# EAGLE board shield_arduino_mega (EAGLE 7.7.0)
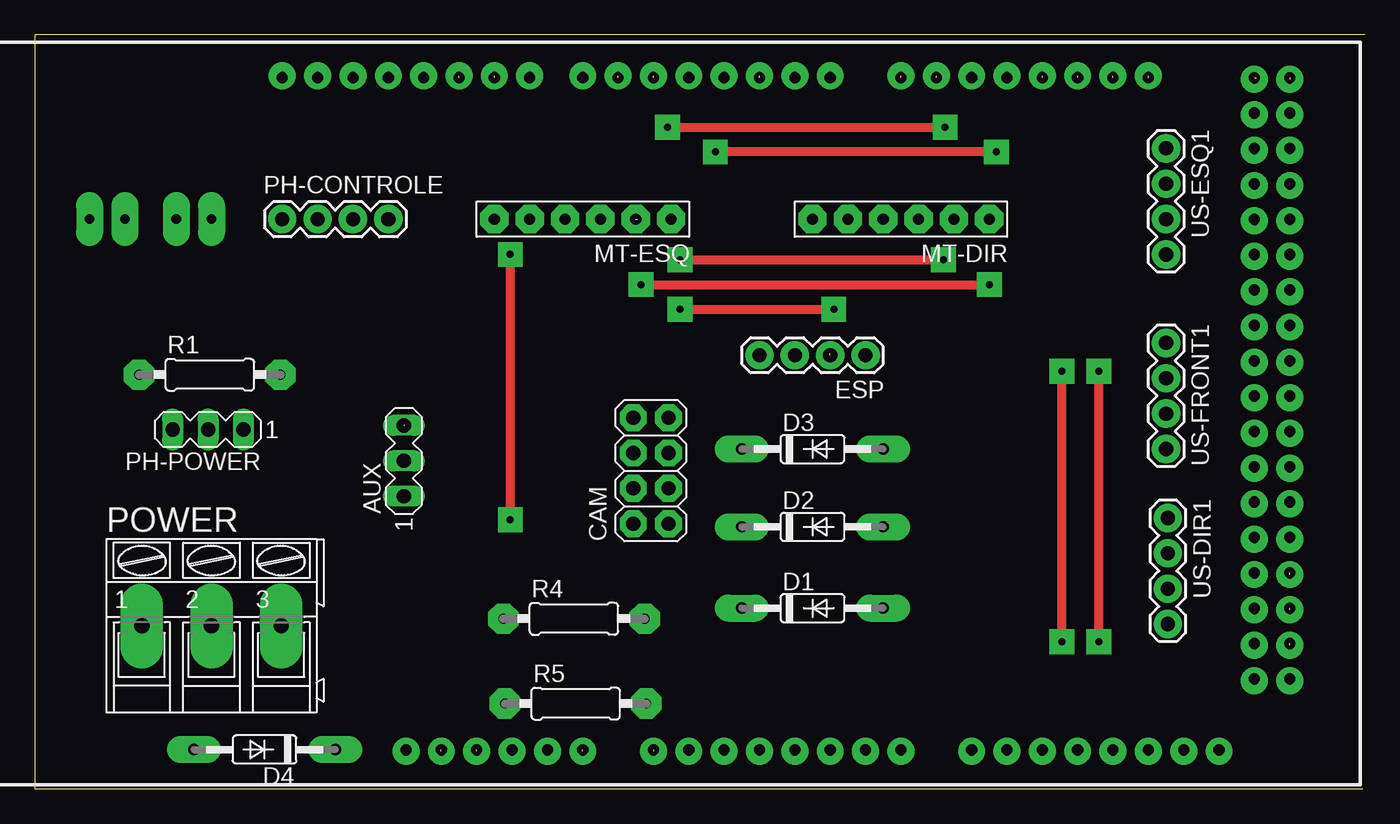
[diagram p0: board, top side]
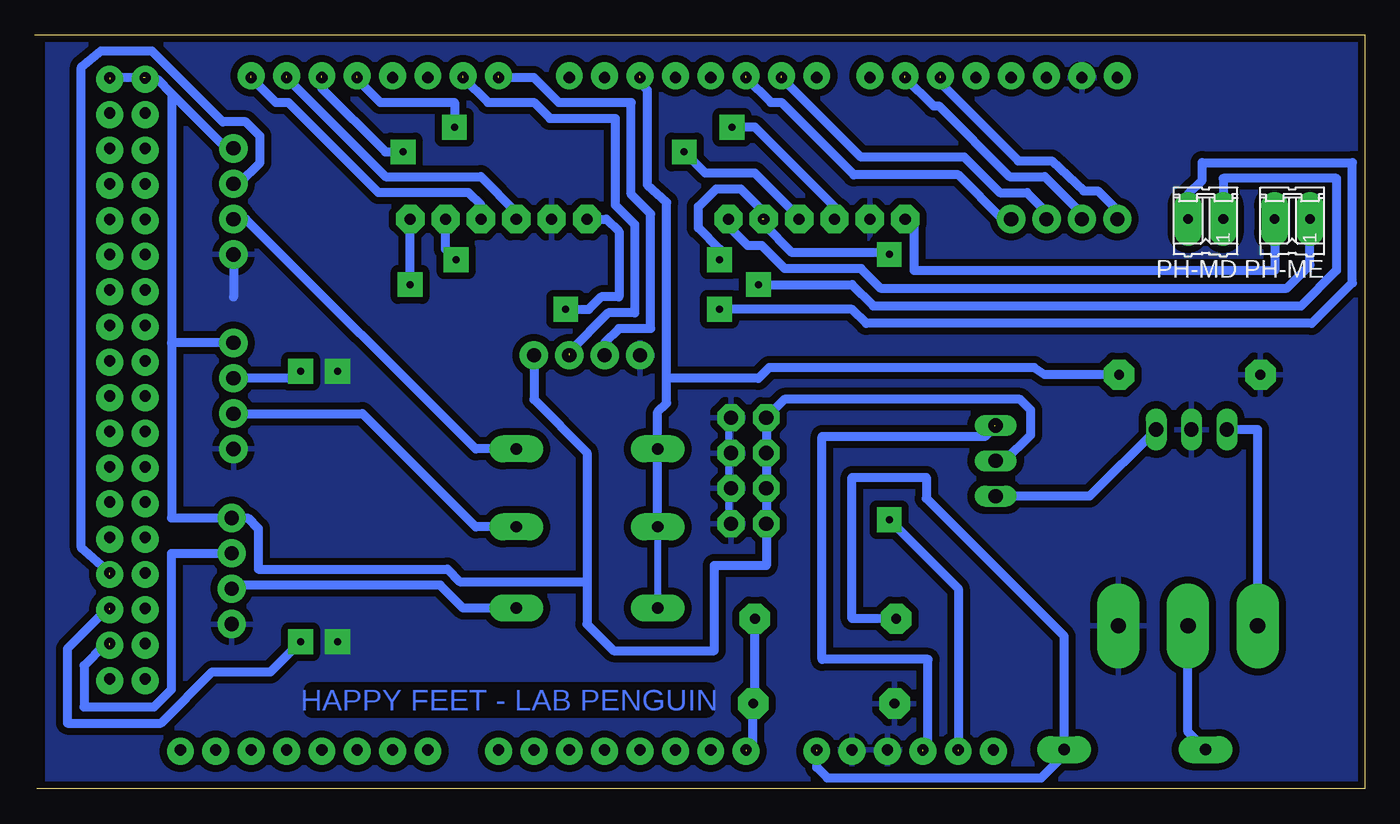
[diagram p1: board, bottom side, seen from below]

Size 95.55 x 54.15 mm. Coordinates in mm from the lower left corner, seen from the top.
Outline: 95.42,0 0,0 0,54.15 95.55,54.15
Copper layers (1*16): Top 0.035mm / dielectric 1.5mm / Bottom 0.035mm
Design rules "default *": minimum track width 20mil, minimum drill 1mil, track to track 20mil, track to pad 20mil, pad to pad 8mil, via to via 8mil, smd to smd 8mil, copper to edge 20mil, drill to drill 1mm, minimum pad ring 10mil, minimum via ring 8mil, stop-mask expansion 1mil, vias tented up to drill 1mil, thermal gap 20mil
Net classes: 0 default: clearance 0.205 mm

## Footprints (pad centres in the part's own frame; a part is rotated, then mirrored left to right if it is on the bottom)
MA03-1 = drill 1.016 long: 1 -2.54,0; 2 0,0; 3 2.54,0
2X04 = drill 1.016 pad 1.93 octagon: 1 -3.81,-1.27; 2 -3.81,1.27; 3 -1.27,-1.27; 4 -1.27,1.27; 5 1.27,-1.27; 6 1.27,1.27; 7 3.81,-1.27; 8 3.81,1.27
DO35-10 = drill 0.813 pad 1.93 long: A 5.08,0; C -5.08,0
1X04-BIG = drill 1.016 pad 2.032: 1 0,0; 2 2.54,0; 3 5.08,0; 4 7.62,0
1X06-BIG-EDIT = drill 0.8 pad 2.032 octagon: 1 -6.35,0; 2 -3.81,0; 3 -1.27,0; 4 1.27,0; 5 3.81,0; 6 6.35,0
02P = drill 0.7 pad 1.93 long: 1 -1.27,0; 2 1.27,0
AK300/3 = drill 1.1 pad 3.048 long: 1 -5.004,0; 2 0,0; 3 5.004,0
0207/10 = drill 0.7 pad 2.184 octagon: 1 -5.08,0; 2 5.08,0
MEGAOUTLINE = drill 0.8: 0 12.7,24.13; 1 10.16,24.13; 2 7.62,24.13; 3 5.08,24.13; 3V3 -15.24,-24.13; 4 2.54,24.13; 5 0,24.13; 5V -12.7,-24.13; 6 -2.54,24.13; 7 -5.08,24.13; 8 -8.89,24.13; 9 -11.43,24.13; 10 -13.97,24.13; 11 -16.51,24.13; 12 -19.05,24.13; 13 -21.59,24.13; 14 17.78,24.13; 15 20.32,24.13; 16 22.86,24.13; 17 25.4,24.13; 18 27.94,24.13; 19 30.48,24.13; 20 33.02,24.13; 21 35.56,24.13; 22 43.18,21.59; 23 45.72,21.59; 24 43.18,19.05; 25 45.72,19.05; 26 43.18,16.51; 27 45.72,16.51; 28 43.18,13.97; 29 45.72,13.97; 30 43.18,11.43; 31 45.72,11.43; 32 43.18,8.89; 33 45.72,8.89; 34 43.18,6.35; 35 45.72,6.35; 36 43.18,3.81; 37 45.72,3.81; 38 43.18,1.27; 39 45.72,1.27; 40 43.18,-1.27; 41 45.72,-1.27; 42 43.18,-3.81; 43 45.72,-3.81; 44 43.18,-6.35; 45 45.72,-6.35; 46 43.18,-8.89; 47 45.72,-8.89; 48 43.18,-11.43; 49 45.72,-11.43; 50 43.18,-13.97; 51 45.72,-13.97; 52 43.18,-16.51; 53 45.72,-16.51; A0 0,-24.13; A1 2.54,-24.13; A2 5.08,-24.13; A3 7.62,-24.13; A4 10.16,-24.13; A5 12.7,-24.13; A6 15.24,-24.13; A7 17.78,-24.13; A8 22.86,-24.13; A9 25.4,-24.13; A10 27.94,-24.13; A11 30.48,-24.13; A12 33.02,-24.13; A13 35.56,-24.13; A14 38.1,-24.13; A15 40.64,-24.13; AREF -26.67,24.13; GND@1 -24.13,24.13; GND@2 -10.16,-24.13; GND@3 -7.62,-24.13; GND@4 43.18,24.13; GND@5 45.72,24.13; GND@6 43.18,-19.05; GND@7 45.72,-19.05; RESET -17.78,-24.13; VIN -5.08,-24.13

## Placement (x,y rotation side)
AUX  [MA03-1]  26.52,23.55 90 top
CAM  [2X04]  44.27,22.84 90 top
D1  1N4148  [DO35-10]  55.88,12.97 0 top
D2  1N4148  [DO35-10]  55.88,18.81 0 top
D3  1N4148  [DO35-10]  55.88,24.4 0 top
D4  1N4148  [DO35-10]  16.51,2.81 180 top
ESP  1X4-BIG  [1X04-BIG]  59.69,31.13 180 top
MT-DIR  [1X06-BIG-EDIT]  62.23,40.91 180 top
MT-ESQ  [1X06-BIG-EDIT]  39.37,40.91 180 top
PH-CONTROLE  1X4-BIG  [1X04-BIG]  17.78,40.91 0 top
PH-MD  [02P]  11.43,40.91 180 bottom
PH-ME  [02P]  5.21,40.91 180 bottom
PH-POWER  [MA03-1]  12.45,25.8 180 top
POWER  [AK300/3]  12.7,11.7 0 top
R1  10k  [0207/10]  12.57,29.73 0 top
R4  3.9k  [0207/10]  38.74,12.21 0 top
R5  10k  [0207/10]  38.86,6.11 0 top
U$1  MEGA_DEVICE  [MEGAOUTLINE]  44.45,26.94 0 top
US-DIR1  1X4-BIG  [1X04-BIG]  81.41,19.45 270 top
US-ESQ1  1X4-BIG  [1X04-BIG]  81.28,45.99 270 top
US-FRONT1  1X4-BIG  [1X04-BIG]  81.28,32.02 270 top

## Library data of the parts
AUX PH-POWER = con-lstb; OC_FARNELL: unknown; OC_NEWARK: unknown
CAM ESP MT-DIR MT-ESQ PH-CONTROLE R1 R4 R5 US-DIR1 US-ESQ1 US-FRONT1 = adafruit
D1-D4 = diode
PH-MD PH-ME = con-amp-quick; OC_FARNELL: unknown; OC_NEWARK: unknown
POWER = con-ptr500; OC_FARNELL: unknown; OC_NEWARK: unknown
U$1 = ArduinoMegaOutline

## Nets
2: D1.C D2.C D3.C R1.2 U$1.2
3V3: MT-DIR.2 MT-ESQ.2 U$1.3V3
5: PH-CONTROLE.4 U$1.5
5V: AUX.2 CAM.2 CAM.4 CAM.6 CAM.8 ESP.1 U$1.GND@4 U$1.GND@5 US-DIR1.1 US-ESQ1.1 US-FRONT1.1
5V-ARD: AUX.3 U$1.5V
5V-H: AUX.1 PH-POWER.1
6: PH-CONTROLE.3 U$1.6
9: PH-CONTROLE.2 U$1.9
10: PH-CONTROLE.1 U$1.10
18: MT-ESQ.4 U$1.18
19: MT-ESQ.3 U$1.19
20: MT-DIR.4 U$1.20
21: MT-DIR.3 U$1.21
49: U$1.49 US-ESQ1.2
51: U$1.51 US-FRONT1.2
53: U$1.53 US-DIR1.2
A0: R4.2 R5.2 U$1.A0
ARD-RX: ESP.2 U$1.15
ARD-TX: ESP.3 U$1.14
ECHO: D3.A US-ESQ1.3
ECHOO: D2.A US-FRONT1.3
ECHOOOOOO: D1.A US-DIR1.3
GND: CAM.1 CAM.3 CAM.5 CAM.7 ESP.4 MT-DIR.5 MT-ESQ.5 PH-POWER.2 POWER.3 R1.1 R5.1 U$1.GND@1 U$1.GND@2 U$1.GND@3 US-DIR1.4 US-ESQ1.4 US-FRONT1.4
MD+: MT-DIR.1 PH-MD.1
MD-: MT-DIR.6 PH-MD.2
ME+: MT-ESQ.1 PH-ME.1
ME-: MT-ESQ.6 PH-ME.2
N$1: D4.A POWER.2
VIN-ARD: D4.C R4.1 U$1.VIN
VIN-PH: PH-POWER.3 POWER.1

## Tracks (layer width: path | path; a pad name or v marks a point on that pad's centre or on a via)
2  (via drill 0.6 pad 1.93)  (1 unrouted)
  Bottom 0.508: D2.C D1.C
  Bottom 0.635: 50.17,29.48 50.17,27.7 50.8,27.07 D3.C D2.C | 50.17,29.48 50.17,42.12 51.56,43.39 51.56,50.18 52.07,50.82 U$1.2 | R1.2 22.99,29.73 23.75,30.24 42.8,30.24 43.56,29.48 50.17,29.48
  other vias: 52.07,51.2
3V3  (via drill 0.5 pad 1.78, 0.6 pad 1.93)  (2 unrouted)
  Top 0.635: v46.36,37.99 v65.28,37.99 | v34.16,38.37 v34.16,19.32
  Bottom 0.635: MT-ESQ.2 43.18,40.53 41.15,38.5 34.16,38.5 v34.16,38.37 | 43.31,40.91 43.18,41.04 43.18,41.42 44.83,43.07 46.61,43.07 47.88,41.8 47.88,40.28 46.36,38.75 v46.36,37.99 | v34.16,19.32 29.21,14.37 U$1.3V3 | v65.28,37.99 66.04,38.75 MT-DIR.2
  other vias: 29.21,2.68
5  (via drill 0.6 pad 1.93)  (1 unrouted)
  Bottom 0.635: PH-CONTROLE.4 26.04,40.91 29.21,44.08 36.7,44.08 41.91,49.29 42.67,49.29 U$1.5
  other vias: 44.45,51.2
5V  (via drill 0.6 pad 1.93)  (2 unrouted)
  Bottom 0.635: AUX.2 26.48,23.51 25.91,23.51 24,25.42 24,27.19 24.77,27.96 41.69,27.96 CAM.8 CAM.6 CAM.4 CAM.2 43,16.02 46.74,16.02 46.74,9.92 53.98,9.92 55.88,11.83 55.88,14.88 | ESP.1 59.69,27.96 55.88,24.15 55.88,14.88 | 85.72,49.93 85.72,32.02 | 85.72,32.02 85.72,19.45 US-DIR1.1 80.26,19.45 79.5,18.68 79.5,15.76 65.91,15.76 65.02,14.88 55.88,14.88 | US-ESQ1.1 81.79,45.99 85.72,49.93 | 85.72,49.93 86.74,50.94 v87.63,50.94 87.76,51.07 U$1.GND@5 | 81.15,31.89 US-FRONT1.1 85.72,32.02
  other vias: 90.17,50.94
5V-ARD  (via drill 0.6 pad 1.93)  (2 unrouted)
  Bottom 0.635: U$1.5V 31.37,3.19 31.37,9.29 38.99,9.29 38.99,25.29 27.32,25.29 26.56,26.05
  other vias: 31.75,2.68
5V-H
  Bottom 0.635: PH-POWER.1 19.77,21.01 AUX.1
6  (via drill 0.6 pad 1.93)  (1 unrouted)
  Bottom 0.635: U$1.6 36.2,45.36 28.77,45.36 26.23,42.81 24.26,42.81 22.86,41.42 PH-CONTROLE.3
  other vias: 41.91,51.2
9  (via drill 0.6 pad 1.93)  (1 unrouted)
  Bottom 0.635: PH-CONTROLE.2 20.32,41.29 22.99,43.96 25.53,43.96 30.61,49.04 30.99,49.04 U$1.9
  other vias: 33.02,51.2
10  (via drill 0.6 pad 1.93)  (1 unrouted)
  Bottom 0.635: PH-CONTROLE.1 17.78,41.55 19.18,42.94 20.19,42.94 22.48,45.1 24.89,45.1 30.48,50.69 U$1.10
  other vias: 30.48,51.2
18  (via drill 0.5 pad 1.78, 0.6 pad 1.93)  (1 unrouted)
  Top 0.635: v45.47,47.51 v65.41,47.51
  Bottom 0.635: v65.41,47.51 65.41,49.29 70.74,49.29 72.39,50.94 U$1.18 | MT-ESQ.4 38.1,41.8 43.82,47.51 v45.47,47.51
  other vias: 72.39,51.2
19  (via drill 0.5 pad 1.78, 0.6 pad 1.93)  (1 unrouted)
  Top 0.635: v69.09,45.74 v48.9,45.74
  Bottom 0.635: MT-ESQ.3 40.64,41.04 43.82,44.21 47.37,44.21 v48.9,45.74 | U$1.19 74.93,50.31 70.36,45.74 v69.09,45.74
  other vias: 74.93,51.2
20  (via drill 0.6 pad 1.93)  (1 unrouted)
  Bottom 0.635: MT-DIR.4 60.96,41.42 63.5,43.96 70.36,43.96 U$1.20
  other vias: 77.47,51.2
21  (via drill 0.6 pad 1.93)  (1 unrouted)
  Bottom 0.635: MT-DIR.3 63.5,41.93 64.39,42.81 70.87,42.81 77.34,49.29 78.23,49.29 U$1.21
  other vias: 80.01,51.2
49  (via drill 0.6 pad 1.93)  (1 unrouted)
  Bottom 0.635: U$1.49 92.2,17.29 92.2,51.83 90.8,52.98 87.12,52.98 82.04,47.89 80.39,47.89 79.38,46.88 79.38,44.97 80.9,43.45 US-ESQ1.2 81.03,43.45
  other vias: 90.17,15.38
51  (via drill 0.5 pad 1.78, 0.6 pad 1.93)  (1 unrouted)
  Top 0.635: v76.45,10.56 v76.45,29.99
  Bottom 0.635: v76.45,29.99 76.96,29.48 US-FRONT1.2 | v90.17,12.84 90.42,12.84 93.22,10.05 93.22,4.71 86.49,4.71 82.8,8.4 78.61,8.4 v76.45,10.56
53  (via drill 0.6 pad 1.93)  (1 unrouted)
  Bottom 0.635: US-DIR1.2 85.72,16.91 85.72,7.13 86.99,5.86 92.01,5.86 92.01,8.84 90.55,10.3 v90.17,10.3
A0  (via drill 0.6 pad 1.93)  (1 unrouted)
  Bottom 0.635: U$1.A0 43.94,2.81 R5.2 43.82,6.11 R4.2
  other vias: 44.45,2.68
ARD-RX  (via drill 0.6 pad 1.93)  (2 unrouted)
  Bottom 0.635: U$1.15 62.99,49.29 59.69,49.29 58.55,48.15 53.85,48.15 53.85,41.93 52.45,40.53 52.45,34.18 54.36,34.18 57.15,31.39 57.15,31.26
  other vias: 64.77,51.2
ARD-TX  (via drill 0.6 pad 1.93)  (1 unrouted)
  Bottom 0.635: ESP.3 54.61,32.02 53.59,33.04 51.31,33.04 51.31,41.29 52.71,42.69 52.71,49.29 57.91,49.29 59.69,51.07 U$1.14
  other vias: 62.23,51.2
ECHO
  Bottom 0.635: US-ESQ1.3 80.39,40.91 63.88,24.4 D3.A
ECHOO
  Bottom 0.635: D2.A 63.88,18.81 72.01,26.94 US-FRONT1.3
ECHOOOOOO
  Bottom 0.635: D1.A 64.77,12.97 66.42,14.62 81.15,14.62 US-DIR1.3
GND  (via drill 0.5 pad 1.78, 0.6 pad 1.93)
  Top 0.635: v73.79,10.56 v73.79,29.99
  Bottom 0.508: CAM.1 45.72,19.32 45.72,21.54 CAM.3 45.72,21.86 45.72,24.08 CAM.5 45.72,24.4 45.72,26.62 CAM.7
  Bottom 0.635: US-ESQ1.4 81.28,35.32 | 12.32,25.54 12.45,25.67
  other vias: 34.29,2.68 36.83,2.68 20.32,51.2
  pour Bottom: 94.61,-0.11 94.61,54.25 0.13,54.37 0.13,-0.37
MD+  (via drill 0.5 pad 1.78)
  Top 0.635: v43.56,36.21 v68.58,36.21
  Bottom 0.635: PH-MD.1 10.16,43.83 2.03,43.83 2.03,37.23 4.57,34.69 35.31,34.69 36.83,36.21 v43.56,36.21 | v68.58,36.21 MT-DIR.1
MD-  (via drill 0.5 pad 1.78)
  Top 0.635: v46.36,34.43 v57.4,34.43
  Bottom 0.635: PH-MD.2 12.7,42.69 11.68,43.7 11.68,44.97 0.89,44.97 0.89,36.34 3.81,33.42 35.81,33.42 36.83,34.43 v46.36,34.43 | MT-DIR.6 54.48,40.91 53.59,40.02 53.59,35.32 54.86,35.32 55.75,34.43 v57.4,34.43
ME+
  Bottom 0.635: PH-ME.1 3.94,37.61 5.59,35.96 34.8,35.96 36.2,37.35 41.66,37.35 43.31,39 44.32,39 45.72,40.4 MT-ESQ.1
ME-
  Bottom 0.635: PH-ME.2 6.48,37.23 32.38,37.23 32.38,40.4 MT-ESQ.6
N$1
  Bottom 0.635: D4.A 12.7,4.08 POWER.2
S$2  (via drill 0.6 pad 1.93)
  other vias: 22.86,51.2
S$3  (via drill 0.6 pad 1.93)
  other vias: 17.78,51.2
S$4  (via drill 0.6 pad 1.93)
  other vias: 25.4,51.2
S$5  (via drill 0.6 pad 1.93)
  other vias: 27.94,51.2
S$8  (via drill 0.6 pad 1.93)
  other vias: 35.56,51.2
S$9  (via drill 0.6 pad 1.93)
  other vias: 39.37,51.2
S$12  (via drill 0.6 pad 1.93)
  other vias: 46.99,51.2
S$13  (via drill 0.6 pad 1.93)
  other vias: 49.53,51.2
S$15  (via drill 0.6 pad 1.93)
  other vias: 54.61,51.2
S$16  (via drill 0.6 pad 1.93)
  other vias: 57.15,51.2
S$19  (via drill 0.6 pad 1.93)
  other vias: 67.31,51.2
S$20  (via drill 0.6 pad 1.93)
  other vias: 69.85,51.2
S$27  (via drill 0.6 pad 1.93)
  other vias: 87.63,48.4
S$28  (via drill 0.6 pad 1.93)
  other vias: 90.17,48.4
S$29  (via drill 0.6 pad 1.93)
  other vias: 90.17,45.86
S$30  (via drill 0.6 pad 1.93)
  other vias: 87.63,45.86
S$31  (via drill 0.6 pad 1.93)
  other vias: 87.63,43.32
S$32  (via drill 0.6 pad 1.93)
  other vias: 90.17,43.32
S$33  (via drill 0.6 pad 1.93)
  other vias: 90.17,40.78
S$34  (via drill 0.6 pad 1.93)
  other vias: 87.63,40.78
S$35  (via drill 0.6 pad 1.93)
  other vias: 87.63,38.24
S$36  (via drill 0.6 pad 1.93)
  other vias: 90.17,38.24
S$37  (via drill 0.6 pad 1.93)
  other vias: 90.17,35.7
S$38  (via drill 0.6 pad 1.93)
  other vias: 87.63,35.7
S$39  (via drill 0.6 pad 1.93)
  other vias: 87.63,33.16
S$40  (via drill 0.6 pad 1.93)
  other vias: 90.17,33.16
S$41  (via drill 0.6 pad 1.93)
  other vias: 90.17,30.62
S$42  (via drill 0.6 pad 1.93)
  other vias: 87.63,30.62
S$43  (via drill 0.6 pad 1.93)
  other vias: 87.63,28.08
S$44  (via drill 0.6 pad 1.93)
  other vias: 90.17,28.08
S$45  (via drill 0.6 pad 1.93)
  other vias: 87.63,25.54
S$46  (via drill 0.6 pad 1.93)
  other vias: 90.17,25.54
S$47  (via drill 0.6 pad 1.93)
  other vias: 87.63,23
S$48  (via drill 0.6 pad 1.93)
  other vias: 90.17,23
S$49  (via drill 0.6 pad 1.93)
  other vias: 87.63,20.46
S$50  (via drill 0.6 pad 1.93)
  other vias: 90.17,20.46
S$51  (via drill 0.6 pad 1.93)
  other vias: 87.63,17.92
S$52  (via drill 0.6 pad 1.93)
  other vias: 90.17,17.92
S$53  (via drill 0.6 pad 1.93)
  other vias: 87.63,15.38
S$55  (via drill 0.6 pad 1.93)
  other vias: 87.63,12.84
S$57  (via drill 0.6 pad 1.93)
  other vias: 87.63,10.3
S$59  (via drill 0.6 pad 1.93)
  other vias: 87.63,7.76
S$60  (via drill 0.6 pad 1.93)
  other vias: 90.17,7.76
S$61  (via drill 0.6 pad 1.93)
  other vias: 85.09,2.68
S$62  (via drill 0.6 pad 1.93)
  other vias: 82.55,2.68
S$63  (via drill 0.6 pad 1.93)
  other vias: 80.01,2.68
S$64  (via drill 0.6 pad 1.93)
  other vias: 77.47,2.68
S$65  (via drill 0.6 pad 1.93)
  other vias: 74.93,2.68
S$66  (via drill 0.6 pad 1.93)
  other vias: 72.39,2.68
S$67  (via drill 0.6 pad 1.93)
  other vias: 69.85,2.68
S$68  (via drill 0.6 pad 1.93)
  other vias: 67.31,2.68
S$69  (via drill 0.6 pad 1.93)
  other vias: 62.23,2.68
S$70  (via drill 0.6 pad 1.93)
  other vias: 59.69,2.68
S$71  (via drill 0.6 pad 1.93)
  other vias: 57.15,2.68
S$72  (via drill 0.6 pad 1.93)
  other vias: 54.61,2.68
S$73  (via drill 0.6 pad 1.93)
  other vias: 52.07,2.68
S$74  (via drill 0.6 pad 1.93)
  other vias: 49.53,2.68
S$75  (via drill 0.6 pad 1.93)
  other vias: 46.99,2.68
S$81  (via drill 0.6 pad 1.93)
  other vias: 26.67,2.68
VIN-ARD  (via drill 0.6 pad 1.93)  (1 unrouted)
  Bottom 0.635: R4.1 36.83,12.21 36.83,22.37 31.5,22.37 31.5,20.84 21.59,10.94 D4.C 21.59,2.43 23.24,0.78 38.61,0.78 39.37,1.54 v39.37,2.68
VIN-PH
  Bottom 0.635: POWER.1 7.7,25.8 PH-POWER.3

## Text on the board
Bottom: HAPPY FEET - LAB PENGUIN